# Altium PCB PCB1.PcbDoc
Units mm, origin at the board's own origin, x right, y up, seen from the top; angles counter-clockwise.
Board outline 35 x 51.18 mm, 4 copper layers (Top Layer 1, Layer 1, Layer 2, Bottom Layer 1), stack 1.626 mm thick; 67 components, 61 nets, 341 pads, 0 vias.
Unrouted connection lines stored in the file: 87.
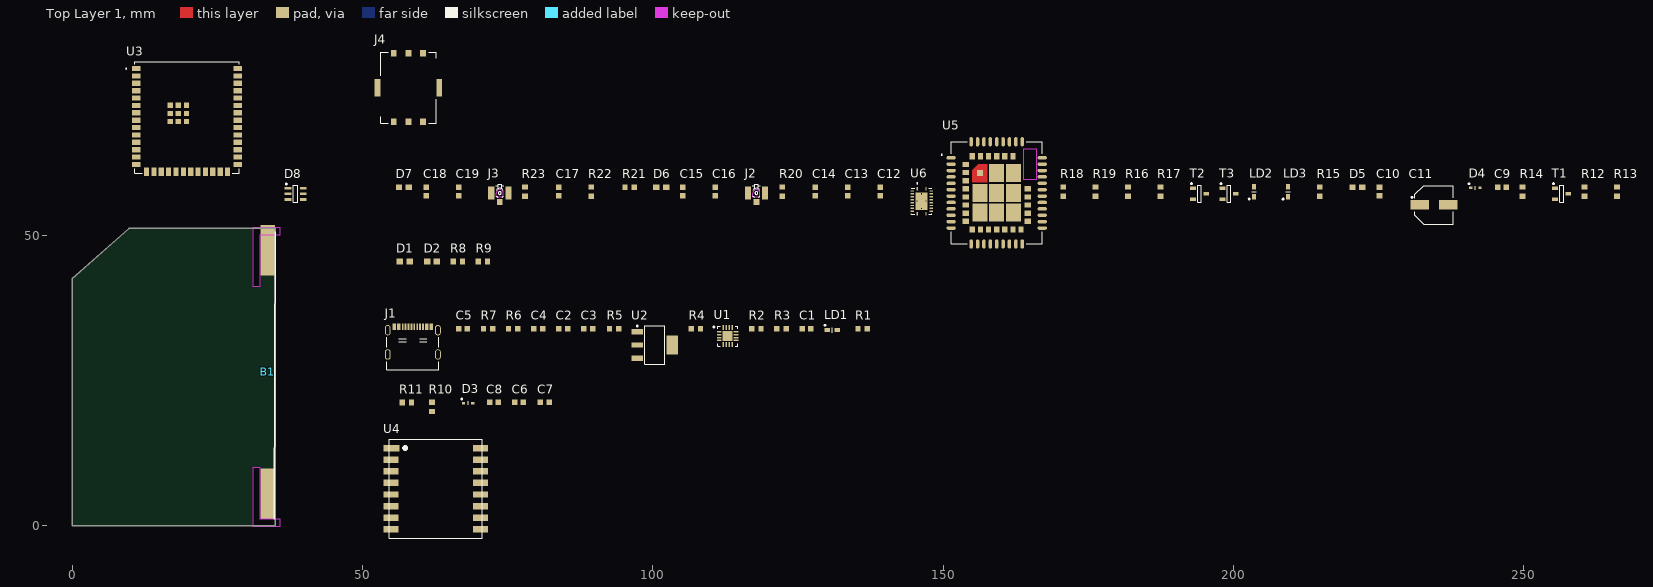
[diagram p0: Top Layer 1 view]
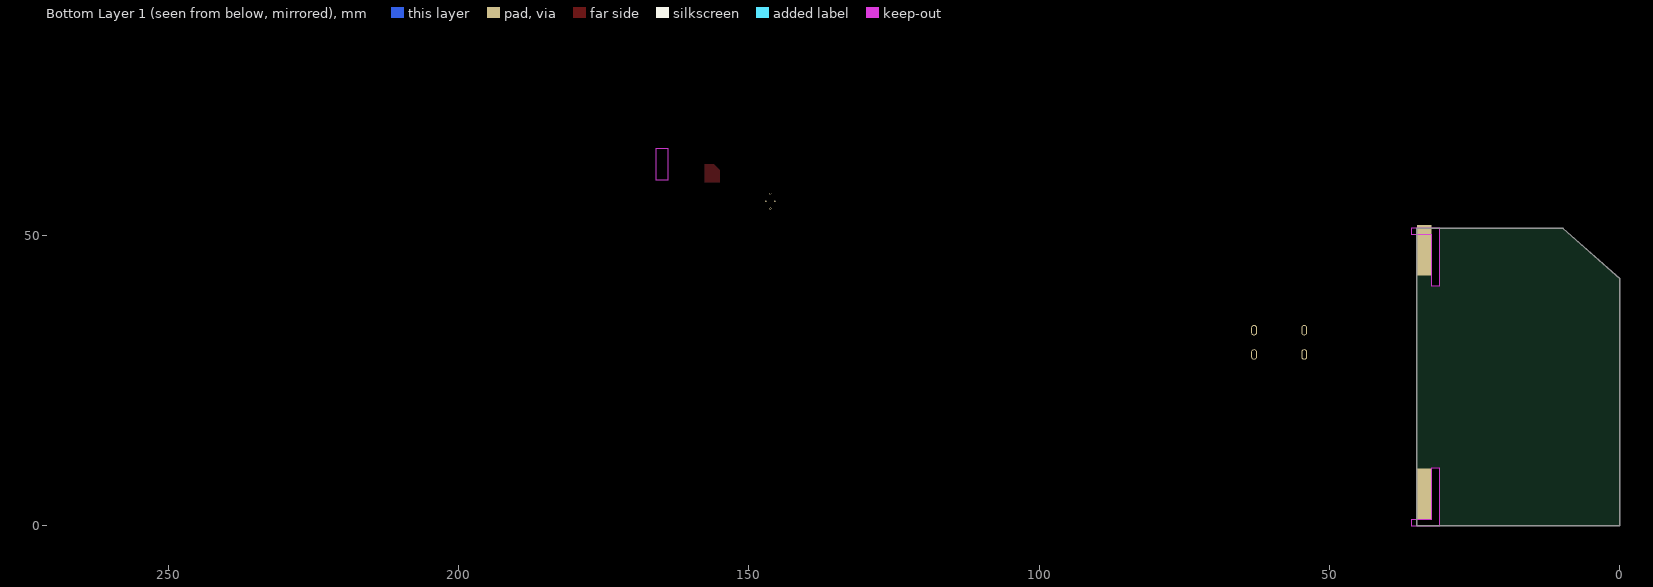
[diagram p1: Bottom Layer 1 view, seen from below]
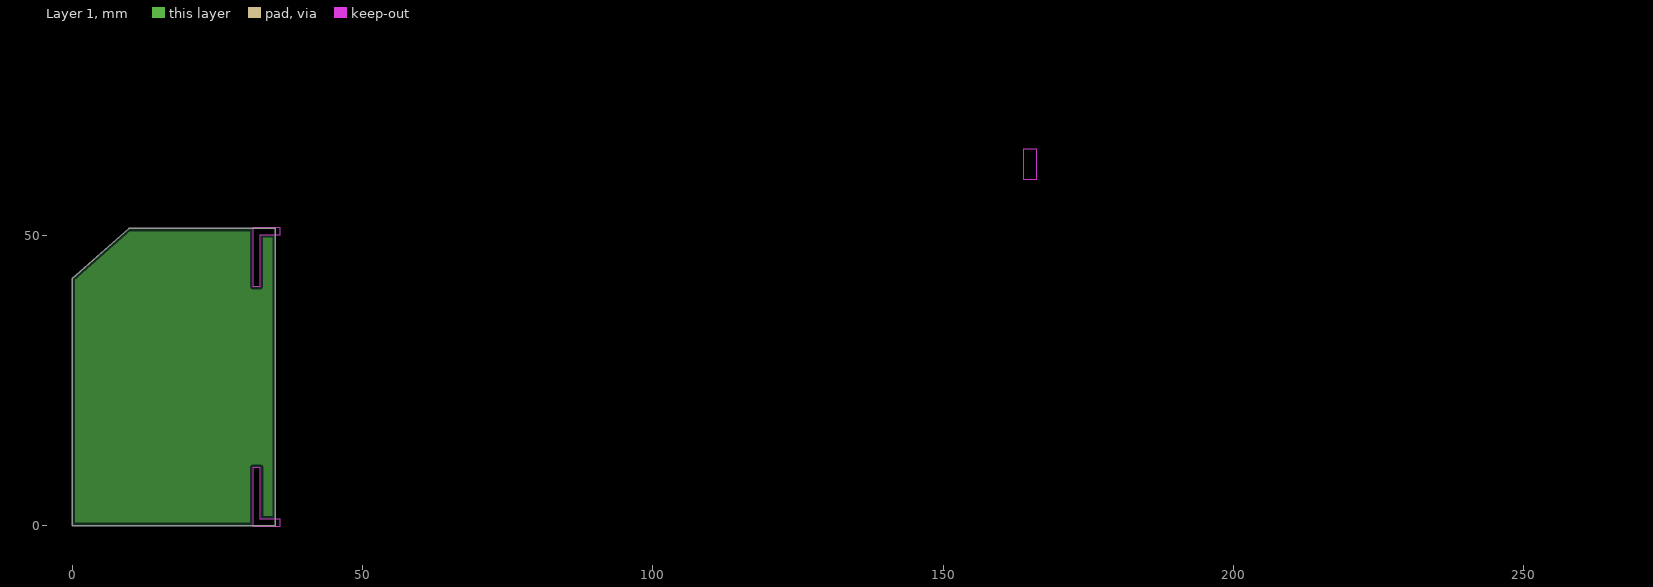
[diagram p2: Layer 1, clearances drawn from the general rule]
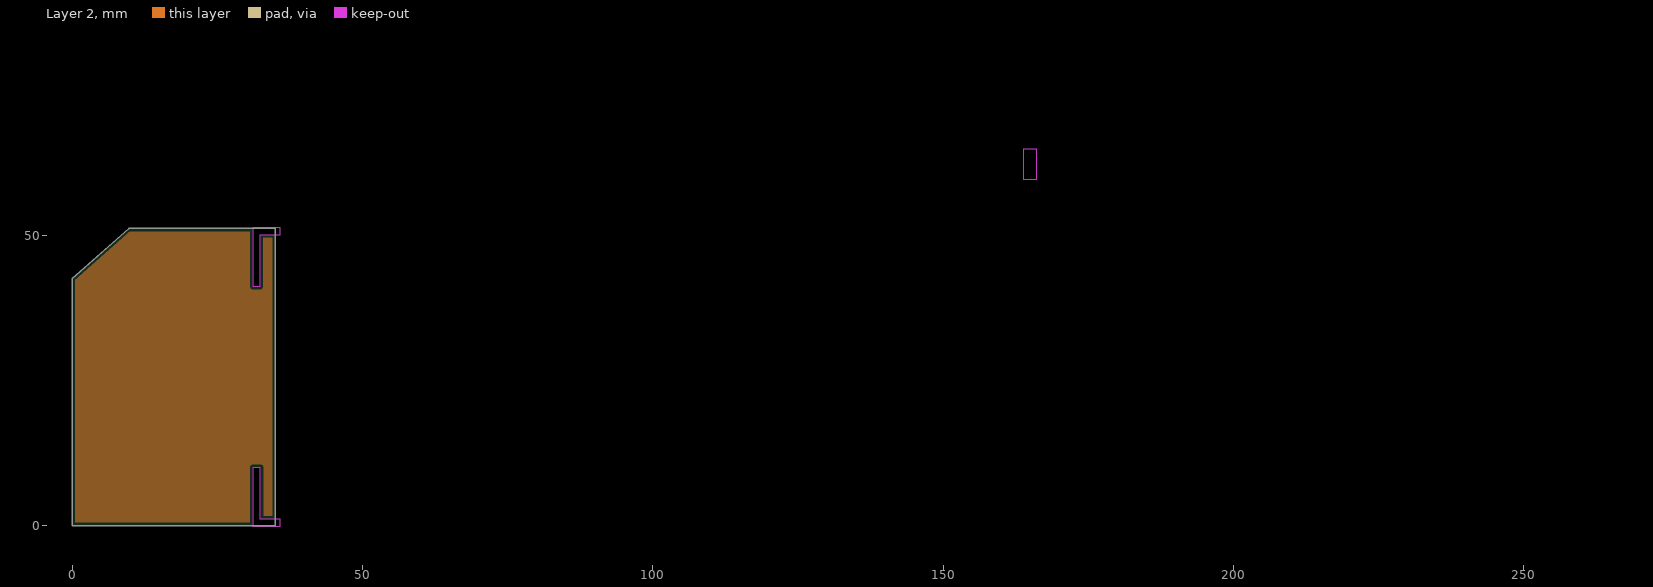
[diagram p3: Layer 2, clearances drawn from the general rule]

## Layer stack, top to bottom
Top Solder: solder mask 0.0102, Solder Resist, Dk 3.5
Top Layer 1: signal copper 0.035
Dielectric 2: prepreg 0.21, PP-006, Dk 4.1
Layer 1: plane copper 0.018, net GND
Dielectric 1: dielectric 1.1, FR-4, Dk 4.8
Layer 2: plane copper 0.018, net GND
Dielectric 3: prepreg 0.21, PP-006, Dk 4.1
Bottom Layer 1: signal copper 0.035
Bottom Solder: solder mask 0.0102, Solder Resist, Dk 3.5

## Board outline
0,0 0,42.511 9.776,51.181 35,51.181 35,0

## Design rules (kind name [scope] priority, off if disabled: settings)
Clearance [All] p1: gap=0.127 ignorepadtopadclearanceinfootprint=FALSE
HoleSize [All] p1: absolutevalues=TRUE maxlimit=6.3 minlimit=0.2 maxpercent=80.000 minpercent=20.000
PlaneClearance [All] p1: clearance=0.508
PlaneConnect [All] p1: planeconnectstyle=Relief reliefexpansion=0.508 reliefentries=4 reliefconductorwidth=0.254 reliefairgap=0.254
PolygonConnect [All] p1: connectstyle=Relief reliefconductorwidth=0.254 reliefentries=4 polygonreliefangle="90 Angle" airgapwidth=0.254
RoutingVias [All] p1: holewidth=0.711 width=1.27 viastyle="Through Hole" minholewidth=0.2 minwidth=0.45 maxholewidth=2.44 maxwidth=3
SolderMaskExpansion [All] p1: expansion=0.102 istentingtop=FALSE
SupplyNets "Schematic Supply Nets_5" [InNet('+1V8')] p1: voltage=0.000
SupplyNets "Schematic Supply Nets_4" [InNet('VUSB')] p2: voltage=0.000
SupplyNets "Schematic Supply Nets_3" [InNet('GND')] p3: voltage=0.000
SupplyNets "Schematic Supply Nets_2" [InNet('VBAT')] p4: voltage=0.000
SupplyNets "Schematic Supply Nets_1" [InNet('+4V4')] p5: voltage=0.000
SupplyNets "Schematic Supply Nets" [InNet('+3V3')] p6: voltage=0.000
Width [All] p1: maxlimit=1 minlimit=0.127 preferedwidth=0.254
27 further rules are at their usual default settings.

## Classes and differential pairs
component class SIM7080G: C9 C10 C11 C12 C13 C14 C15 C16 C17 C18 C19 D4 D5 D6 D7 D8 J2 J3 J4 LD2 LD3 R12 R13 R14 R15 R16 R17 R18 R19 R20 R21 R22 R23 T1 T2 T3 U5 U6
component class MCU: C6 C7 C8 D3 R10 R11 U3 U4
component class Power: B1 C1 C2 C3 C4 C5 C21 C27 D1 D2 J1 LD1 R1 R2 R3 R4 R5 R6 R7 R8 R9 R24 R25 R26 R27 R28 U1 U2

## Components (designator, comment, footprint, x,y, rotation, side; value= is the part's Value field where it differs from the comment)
B1 "Battery" PCB.BATTERY.HOLDER.14500 34.817,1.107 r90 top locked
C1 "1uF" CAPC1608X90N 126.492,33.909 r0 top
C2 "1uF" CAPC1608X90N 84.582,33.909 r0 top
C3 "4.7uF" CAPC1608X90N 88.9,33.909 r0 top
C4 "22uF" CAPC1608X90N 80.264,33.909 r0 top
C5 "1uF" CAPC1608X90N 67.31,33.909 r0 top
C6 "100nF" CAPC1608X90N 76.962,21.209 r0 top
C7 "1uF" CAPC1608X90N 81.407,21.209 r0 top
C8 "100nF" CAPC1608X90N 72.644,21.209 r0 top
C9 "100nF" CAPC1608X90N 246.253,58.293 r0 top
C10 "1uF" CAPC1608X90N 225.171,57.531 r90 top
C11 "100uF" CAPAE660X540N 234.569,55.245 r0 top
C12 "100nF" CAPC1608X90N 139.192,57.531 r90 top
C13 "100nF" CAPC1608X90N 133.604,57.531 r90 top
C14 "100nF" CAPC1608X90N 128.016,57.531 r90 top
C15 "100nF" CAPC1608X90N 105.156,57.531 r90 top
C16 "100nF" CAPC1608X90N 110.744,57.531 r90 top
C17 "100nF" CAPC1608X90N 83.82,57.531 r90 top
C18 "100nF" CAPC1608X90N 60.96,57.531 r90 top
C19 "100nF" CAPC1608X90N 66.548,57.531 r90 top
D1 "0603ESDA-MLP1" EATON_0603ESDA-MLP 57.277,45.466 r0 top
D2 "0603ESDA-MLP1" EATON_0603ESDA-MLP 61.976,45.466 r0 top
D3 "VESD01C1-02VHG3" SODFL1608X70N 68.199,21.082 r0 top
D4 "VESD01C1-02VHG3" SODFL1608X70N 241.681,58.166 r0 top
D5 "0603ESDA-MLP1" EATON_0603ESDA-MLP 221.361,58.293 r0 top
D6 "0603ESDA-MLP1" EATON_0603ESDA-MLP 101.473,58.293 r0 top
D7 "0603ESDA-MLP1" EATON_0603ESDA-MLP 57.15,58.293 r0 top
D8 "BZA462A" SOT95P275X110-6N 38.481,57.15 r0 top
J1 "USB 2.0" GCT_USB4105-GF-A 58.676,31.565 r0 top
J2 "U.FL" HIROSE_U.FL-R-SMT-1(10) 117.856,57.277 r0 top
J3 "U.FL" HIROSE_U.FL-R-SMT-1(10) 73.66,57.277 r0 top
J4 "SIMCard" Connector.SIM805 57.912,75.438 r0 top
LD1 "Red" LED_DIALIGHT_598-8010-107F 130.937,33.655 r0 top
LD2 "Red" LED_DIALIGHT_598-8010-107F 203.581,57.531 r90 top
LD3 "Red" LED_DIALIGHT_598-8010-107F 209.423,57.531 r90 top
R1 "1.5k" RESC1608X55N 136.144,33.909 r0 top
R2 "1.13k" RESC1608X55N 117.856,33.909 r0 top
R3 "46.4k" RESC1608X55N 122.174,33.909 r0 top
R4 "1.18k" RESC1608X55N 107.442,33.909 r0 top
R5 "10k" RESC1608X55N 93.345,33.909 r0 top
R6 "1.18K" RESC1608X55N 75.946,33.909 r0 top
R7 "1.18K" RESC1608X55N 71.628,33.909 r0 top
R8 "51k" RESC1608X55N 66.421,45.466 r0 top
R9 "51k" RESC1608X55N 70.739,45.466 r0 top
R10 "1.13k" RESC1608X55N 61.976,20.447 r90 top
R11 "1.13k" RESC1608X55N 57.658,21.209 r0 top
R12 "4.3k" RESC1608X55N 260.477,57.531 r90 top
R13 "4.3k" RESC1608X55N 266.065,57.531 r90 top
R14 "4.3k" RESC1608X55N 249.809,57.531 r90 top
R15 "43k" RESC1608X55N 214.884,57.531 r90 top
R16 "4.3k" RESC1608X55N 181.864,57.531 r90 top
R17 "4.3k" RESC1608X55N 187.452,57.531 r90 top
R18 "43k" RESC1608X55N 170.688,57.531 r90 top
R19 "43k" RESC1608X55N 176.276,57.531 r90 top
R20 "43k" RESC1608X55N 122.301,57.531 r90 top
R21 "43k" RESC1608X55N 96.012,58.293 r0 top
R22 "43k" RESC1608X55N 89.408,57.531 r90 top
R23 "43k" RESC1608X55N 77.978,57.531 r90 top
T1 "BC817" SOT95P230X110-3N 256.54,57.15 r0 top
T2 "BC817" SOT95P230X110-3N 194.183,57.15 r0 top
T3 "BC817" SOT95P230X110-3N 199.263,57.15 r0 top
U1 "BQ24073RGTR" bq24073 112.903,32.639 r0 top
U2 "AMS1117-3.3" IC.AMS1117-3.3 100.33,31.115 r0 top
U3 "ESP32.S3" IC.ESP32.S3.WROOM.1U 11.038,78.716 r0 top
U4 "LoRaModual" IC.RA-02 62.611,6.35 r0 top
U5 "IC.SIM7080G" IC.SIM7080G 159.237,57.306 r0 top
U6 "IC.TXB0108RGYR" IC.TXB0108RGYR 146.304,55.88 r0 top

## Footprints (in the part's own frame and the unit in brackets; to place one, negate y for a bottom-side part, rotate by r counter-clockwise, add the part's x,y. Pads: shape width x height; smd on the part's side, far side on the other; paste and mask are expansions set on the pad)
bq24073 [mm] "QFN, 16-Leads, Body 3.00x3.00mm, Pitch 0.50mm, Thermal Pad 1.70x1.70mm, IPC Medium Density"
  rect 0.85x0.25 smd: 1(-1.45,0.75) 2(-1.45,0.25) 3(-1.45,-0.25) 4(-1.45,-0.75) 9(1.45,-0.75) 10(1.45,-0.25) 11(1.45,0.25) 12(1.45,0.75)
  rect 0.25x0.85 smd: 5(-0.75,-1.45) 6(-0.25,-1.45) 7(0.25,-1.45) 8(0.75,-1.45) 13(0.75,1.45) 14(0.25,1.45) 15(-0.25,1.45) 16(-0.75,1.45)
  rect 1.7x1.7 smd: 17(0,0)
  silkscreen extent -2.5,-1.73 1.73,1.73, body extent -1.63,-1.63 1.63,1.63, height 1
CAPAE660X540N [mm] "Capacitor, Aluminium Electrolytric, 6.6mm L X 6.6mm W X 5.4mm H, IPC Medium Density"
  rect 3.15x1.6 smd: 1(-2.45,0) 2(2.45,0)
  silkscreen extent -3.95,-3.3 3.3,3.3, body extent -3.9,-3.4 3.9,3.4, height 5.7
CAPC1608X90N [mm] "Chip Capacitor, Body 1.6x0.8mm IPC Medium Density"
  rect 0.95x0.95 smd: 1(-0.75,0) 2(0.75,0)
  body extent -0.85,-0.45 0.85,0.45, height 0.9
Connector.SIM805 [mm]
  rect 1x1.1 smd: C1(2.54,-5.9) C2(0,-5.9) C3(-2.54,-5.9) C5(2.54,5.9) C6(0,5.9) C7(-2.54,5.9)
  rect 1x3 smd: C4(5.3,0) C8(-5.3,0)
  silkscreen extent -4.77,-6.1 4.77,6.1, body extent -5.53,-5.85 5.27,6.35, height 1.35
EATON_0603ESDA-MLP [mm] "0603, 2-Leads, Body 1.57mm L X 0.81mm W X 0.38mm H body, IPC Medium Density"
  rect 1.1x1 smd: 1(-0.85,0) 2(0.85,0)
  body extent -0.79,-0.41 0.79,0.41, height 0.38
GCT_USB4105-GF-A [mm] "USB-C (USB TYPE-C) USB 2.0 Receptacle Connector 24 (16+8 Dummy) Position Surface Mount, Right Angle; Through Hole"
  rect 0.6x1.15 smd: A1(-3.2,2.665) A4(-2.4,2.665) A9(2.4,2.665) A12(3.2,2.665)
  rect 0.3x1.15 smd: A5(-1.25,2.665) A6(-0.25,2.665) A7(0.25,2.665) A8(1.25,2.665) B5(1.75,2.665) B6(0.75,2.665) B7(-0.75,2.665) B8(-1.75,2.665)
  round 0.15 hole 0.65 mask+0.25: MEC1(-2.89,1.59) MEC2(2.89,1.59)
  oval 1x1.8 hole 0.6 slot 1.4 at 90 deg: SHIELD(-4.32,-2.09) SHIELD(-4.32,2.09) SHIELD(4.32,-2.09) SHIELD(4.32,2.09)
  silkscreen extent -4.47,-4.69 4.47,0.85, body extent -4.47,-4.69 4.47,3.01, height 3.26
HIROSE_U.FL-R-SMT-1(10) [mm] "Up to 6GHz Ultra Small Surface Mount Male Coaxial Connectors U.FL Series"
  rect 1x1.05 smd: 1(0,-1.525)
  rect 1.05x2.2 smd: 2(-1.475,0) 2(1.475,0)
  Top Layer 1 keep-out lines w0.1: -0.6,-0.65 0.6,-0.65 0.6,0 ccw(c0,0) -0.6,0 -0.6,-0.65
  silkscreen extent -0.7,-0.69 0.7,1.55, body extent -1.5,-1.55 1.5,1.55, height 1.25
IC.AMS1117-3.3 [mm] "SOT223, 4-Leads, Body 6.51x7.00mm (avg), Pitch 2.29mm, IPC Medium Density"
  rect 2x0.9 smd: 1(-3,2.29) 2(-3,0) 3(-3,-2.29)
  rect 2x3.25 smd: 4(3,0)
  silkscreen extent -3.12,-3.35 1.7,3.41, body extent -3.5,-3.35 3.5,3.35, height 1.8
IC.ESP32.S3.WROOM.1U [mm]
  rect 1.5x0.9 smd: 1(0,0) 2(0,-1.27) 3(0,-2.54) 4(0,-3.81) 5(0,-5.08) 6(0,-6.35) 7(0,-7.62) 8(0,-8.89) 9(0,-10.16) 10(0,-11.43) 11(0,-12.7) 12(0,-13.97) 13(0,-15.24) 14(0,-16.51) 27(17.5,-16.51) 28(17.5,-15.24) 29(17.5,-13.97) 30(17.5,-12.7) 31(17.5,-11.43) 32(17.5,-10.16) 33(17.5,-8.89) 34(17.5,-7.62) 35(17.5,-6.35) 36(17.5,-5.08) 37(17.5,-3.81) 38(17.5,-2.54) 39(17.5,-1.27) 40(17.5,0)
  rect 0.9x1.5 smd: 15(1.765,-17.76) 16(3.035,-17.76) 17(4.305,-17.76) 18(5.575,-17.76) 19(6.845,-17.76) 20(8.115,-17.76) 21(9.385,-17.76) 22(10.655,-17.76) 23(11.925,-17.76) 24(13.195,-17.76) 25(14.465,-17.76) 26(15.735,-17.76)
  rect 0.9x0.9 smd: 41_1(5.85,-6.32) 41_2(7.25,-6.32) 41_3(8.65,-6.32) 41_4(5.85,-7.72) 41_5(7.25,-7.72) 41_6(8.65,-7.72) 41_7(5.85,-9.12) 41_8(7.25,-9.12) 41_9(8.65,-9.12)
  silkscreen extent -1.85,-18.01 17.75,1.19, body extent -0.25,-18.01 17.75,1.19, height 3.35
IC.RA-02 [mm]
  rect 2.8x1.1 smd: 1(-7.6,7)
  rect 2.6x1.1 smd: 2(-7.7,5) 3(-7.7,3) 4(-7.7,1) 5(-7.7,-1) 6(-7.7,-3) 7(-7.7,-5) 8(-7.7,-7) 9(7.7,-7) 10(7.7,-5) 11(7.7,-3) 12(7.7,-1) 13(7.7,1) 14(7.7,3) 15(7.7,5) 16(7.7,7)
  silkscreen extent -8,-8.5 8,8.5, body extent -8.5,-8.5 8.5,8.5, height 3.3
IC.SIM7080G [mm]
  oval 1.6x0.6 smd paste-2: 1(-7.85,6.05) 2(-7.85,4.95) 3(-7.85,3.85) 4(-7.85,2.75) 5(-7.85,1.65) 6(-7.85,0.55) 7(-7.85,-0.55) 8(-7.85,-1.65) 9(-7.85,-2.75) 10(-7.85,-3.85) 11(-7.85,-4.95) 12(-7.85,-6.05) 22(7.85,-6.05) 23(7.85,-4.95) 24(7.85,-3.85) 25(7.85,-2.75) 26(7.85,-1.65) 27(7.85,-0.55) 28(7.85,0.55) 29(7.85,1.65) 30(7.85,2.75) 31(7.85,3.85) 32(7.85,4.95) 33(7.85,6.05)
  oval 0.6x1.6 smd paste-2: 13(-4.4,-8.8) 14(-3.3,-8.8) 15(-2.2,-8.8) 16(-1.1,-8.8) 17(0,-8.8) 18(1.1,-8.8) 19(2.2,-8.8) 20(3.3,-8.8) 21(4.4,-8.8) 34(4.4,8.8) 35(3.3,8.8) 36(2.2,8.8) 37(1.1,8.8) 38(0,8.8) 39(-1.1,8.8) 40(-2.2,8.8) 41(-3.3,8.8) 42(-4.4,8.8)
  rect 1.1x0.9 smd paste-2: 43(-5.35,4.9) 44(-5.35,3.5) 45(-5.35,2.1) 46(-5.35,0.7) 47(-5.35,-0.7) 48(-5.35,-2.1) 49(-5.35,-3.5) 50(-5.35,-4.9) 58(5.35,-4.9) 59(5.35,-3.5) 60(5.35,-2.1) 61(5.35,-0.7) 62(5.35,0.7)
  rect 0.9x1.1 smd paste-2: 51(-4.2,-6.3) 52(-2.8,-6.3) 53(-1.4,-6.3) 54(0,-6.3) 55(1.4,-6.3) 56(2.8,-6.3) 57(4.2,-6.3) 63(2.8,6.3) 64(1.4,6.3) 65(0,6.3) 66(-1.4,6.3) 67(-2.8,6.3) 68(-4.2,6.3)
  rect 1x1 smd paste-1 mask+0: 69(-2.9,3.4)
  rect 2.6x3.1 smd paste-3: 70(-2.9,0) 71(-2.9,-3.4) 72(0,-3.4) 73(2.9,-3.4) 74(2.9,0) 75(2.9,3.4) 76(0,3.4) 77(0,0)
  Top Layer 1 region: -1.6,1.85 -4.2,1.85 -4.2,3.92 -3.17,4.95 -1.6,4.95
  Keep-Out Layer region: 6.8,2.3 4.65,2.3 4.65,7.6 6.8,7.6
  silkscreen extent -9.55,-8.8 7.85,8.8, body extent -7.85,-8.8 7.85,8.8, height 2.6
IC.TXB0108RGYR [mm]
  rrect5% 0.24x0.6 smd: 1(-0.75,2.15) 10(-0.75,-2.15) 11(0.75,-2.15) 20(0.75,2.15)
  rrect5% 0.6x0.24 smd: 2(-1.65,1.75) 3(-1.65,1.25) 4(-1.65,0.75) 5(-1.65,0.25) 6(-1.65,-0.25) 7(-1.65,-0.75) 8(-1.65,-1.25) 9(-1.65,-1.75) 12(1.65,-1.75) 13(1.65,-1.25) 14(1.65,-0.75) 15(1.65,-0.25) 16(1.65,0.25) 17(1.65,0.75) 18(1.65,1.25) 19(1.65,1.75)
  rect 2.05x3.05 smd paste-3: 21(0,0)
  round 0.3 hole 0.2 mask+0: 21_1(0,1.275) 21_2(-0.775,0) 21_3(0.775,0) 21_4(0,-1.275)
  silkscreen extent -1.75,-2.25 1.75,3.15, body extent -1.75,-2.25 1.75,2.25, height 1
LED_DIALIGHT_598-8010-107F [mm] "SMT Red LED, Body 1.6x0.8mm, 0603 Case,  DIALIGHT 598 Series"
  rect 0.95x0.7 smd: 1(-0.85,0) 2(0.85,0)
  silkscreen extent -1.42,-0.4 0,0.97, body extent -0.81,-0.39 0.81,0.39, height 0.71
PCB.BATTERY.HOLDER.14500 [mm] "PCB Battery Holder Embeded in PCB"
  rect 8.7x2.5 all layers, no hole: 1(4.354,1.162) 2(46.352,1.143)
  Keep-Out Layer board cut-out: 8.89,3.683 -1.209,3.683 -1.209,-0.998 -1.206,-1.001 0,-1.001 0,2.413 8.89,2.413
  Keep-Out Layer board cut-out: 50.203,3.697 40.105,3.697 40.107,2.427 48.997,2.427 48.997,-0.987 50.203,-0.987
  silkscreen extent 0,-0.13 49.53,0, body extent -1.14,-14.33 50.16,3.67, height 7.05
RESC1608X55N [mm] "Chip Resistor, EIA 0603, Metric 1608, Body 1.6x0.8mm, IPC Medium Density"
  rect 0.9x1 smd: 1(-0.8,0) 2(0.8,0)
  body extent -0.87,-0.47 0.88,0.48, height 0.55
SODFL1608X70N [mm] "SODFL (SOD-523) Diode; 1.20mm W X 0.80mm L X 0.70mm H Body, IPC Medium Density"
  rect 0.55x0.42 smd: 1(-0.8,0) 2(0.8,0)
  silkscreen extent -1.22,-0.3 0,0.83, body extent -0.8,-0.4 0.8,0.4, height 0.7
SOT95P230X110-3N [mm] "SOT23, 3 pin, Pitch 0.95mm - 1.3mm W X 2.9mm L X 1.1mm H, IPC Medium Density"
  rect 1x0.6 smd: 1(-1.15,0.95) 2(-1.15,-0.95) 3(1.15,0)
  silkscreen extent -1.52,-1.45 0.33,1.87, body extent -1.08,-1.5 1.25,1.5, height 1.1
SOT95P275X110-6N [mm] "SOT, 0.95mm Pitch; 6 Pin, 1.50mm W X 2.90mm L X 1.10mm H body, IPC Medium Density"
  rect 1.15x0.5 smd: 1(-1.3,0.95) 2(-1.3,0) 3(-1.3,-0.95) 4(1.3,-0.95) 5(1.3,0) 6(1.3,0.95)
  silkscreen extent -1.72,-1.45 0.4,1.82, body extent -1.39,-1.55 1.39,1.55, height 1.1

## Part data
B1: library part PCB.Battery.Holder.14500, "PCB Battery Holder Embeded in PCB"
C1 C2 C5 C7 C10: library part CC0603_1UF_10V_10%_X5R, "Non-polarised capacitor", Case=0603, Manufacturer=GENERIC, Manufacturer1 ComponentHeight=0.9mm, Manufacturer1 Example=AVX, Manufacturer1 Part Number=0603ZD105KAT, Tolerance=±10%, Voltage=10V, Author="CERN DEM HF", Component Type=Standard, CreateDate=7/10/2023, HelpURL=\\cern.ch\dfs\Applications\Altium\Datasheets\CC0603_X5R_AVX_0603ZD105KAT.pdf, LatestRevisionDate=7/10/2023, Manufacturer Part Number=CC0603_1UF_10V_10%_X5R, Mounted=Yes, Part Description="SMD Multilayer Chip Ceramic Capacitor", Part Number=CC0603_1UF_10V_10%_X5R, Pin Count=2, Sense=No, SMD=Yes, Socket=No, Status=None, TC=X5R
C3: library part CC0603_4.7UF_10V_10%_X5R, "Non-polarised capacitor", Case=0603, Manufacturer=GENERIC, Manufacturer1 ComponentHeight=0.95mm, Manufacturer1 Example=TDK, Manufacturer1 Part Number=C1608X5R1A475K080, Tolerance=±10%, Voltage=10V, Author="CERN DEM HF", Component Type=Standard, CreateDate=7/10/2023, HelpURL=\\cern.ch\dfs\Applications\Altium\Datasheets\CC0603_X5R_TDK_C_Serie.pdf, LatestRevisionDate=7/10/2023, Manufacturer Part Number=CC0603_4.7UF_10V_10%_X5R, Mounted=Yes, Part Description="SMD Multilayer Chip Ceramic Capacitor", Part Number=CC0603_4.7UF_10V_10%_X5R, Pin Count=2, Sense=No, SMD=Yes, Socket=No, Status=Preferred, TC=X5R
C4: library part CC0603_22UF_10V_20%_X5R, "Non-polarised capacitor", Case=0603, Manufacturer=GENERIC, Manufacturer1 ComponentHeight=0.9mm, Manufacturer1 Example=TDK, Manufacturer1 Part Number=C1608X5R1A226M080, Tolerance=±20%, Voltage=10V, Author="CERN DEM BC", Component Type=Standard, CreateDate=12/3/2020, HelpURL=\\cern.ch\dfs\Applications\Altium\Datasheets\CC0603_X5R_TDK_C.pdf, LatestRevisionDate=12/3/2020, Manufacturer Part Number=CC0603_22UF_10V_20%_X5R, Mounted=Yes, Part Description="SMD Multilayer Chip Ceramic Capacitor", Part Number=CC0603_22UF_10V_20%_X5R, Pin Count=2, Sense=No, SMD=Yes, Socket=No, Status=None, TC=X5R
C6 C8 C9 C12 C13 C14 C15 C16 C17 C18 C19: library part CC0603_100NF_25V_20%_X5R_TDK_CGA3E2X5R1E104M080, "Non-polarised capacitor", Case=0603, Manufacturer=TDK, Manufacturer Part Number=CGA3E2X5R1E104M080, Tolerance=±20%, Voltage=25V, Author="CERN DEM BC", Component Type=Standard, ComponentHeight=0.9mm, CreateDate=7/1/2020, HelpURL="\\cern.ch\dfs\Applications\Altium\Datasheets\CC0603_X5R_TDK_CGA(Up to 75V).pdf", LatestRevisionDate=7/1/2020, Mounted=Yes, Part Description="SMD Multilayer Chip Ceramic Capacitor (Automotive Grade)", Part Number=CC0603_100NF_25V_20%_X5R_TDK_CGA3E2X5R1E104M080, Pin Count=2, Sense=No, SMD=Yes, Socket=No, Status="Not Recommended", TC=X5R
C11: library part CAE660-540_100UF_6.3V_20%, "Polarised capacitor", Case=D, Manufacturer=PANASONIC, Manufacturer Part Number=EEEFK0J101AP, Tolerance=±20%, Voltage=6.3V, Author="CERN DEM JLC", Component Type=Standard, ComponentHeight=5.8mm, CreateDate=12/3/2007, HelpURL=\\cern.ch\dfs\Applications\Altium\Datasheets\CAE_PANASONIC_FK-V.pdf, LatestRevisionDate=11/5/2014, Mounted=Yes, Part Description="Aluminum Electrolytic SMT Capacitor", Part Number=CAE660-540_100UF_6.3V_20%, Pin Count=2, Sense=No, SMD=Yes, Socket=No, Status="Not Recommended"
D1 D2 D5 D6 D7: "Transient Voltage Suppressor Diode (Bi-Directional)", Case=0603, Manufacturer=EATON, Voltage=8kV, Author="CERN DEM HF", Bonding=No, Component Type=Standard, ComponentHeight=0.38mm, CreateDate=9/21/2022, Device=0603ESDA-MLP1, HelpURL=\\cern.ch\dfs\Applications\Altium\Datasheets\0603ESDA-MLP1.pdf, LatestRevisionDate=9/21/2022, Manufacturer Part Number=0603ESDA-MLP1, Mounted=Yes, PackageDescription="0603, 2-Leads, Body 1.1mm L X 0.53mm W X 0.44mm H body, IPC Medium Density", Part Description="0.05pF 8kV Bidirectional ESD Voltage Suppressor", Part Number=0603ESDA-MLP1, Pin Count=2, PressFit=No, Sense=No, SMD=Yes, Socket=No
D3 D4: "Transient Voltage Suppressor Diode (Uni-Directional)", Case=SOD-523, Manufacturer="VISHAY SEMICONDUCTORS", Power=100W, Voltage=1V, Author="CERN DEM BC", Bonding=No, Component Type=Standard, ComponentHeight=0.7mm, CreateDate=5/19/2020, Device=VESD01C1-02VHG3, HelpURL=\\cern.ch\dfs\Applications\Altium\Datasheets\VESD01C1-02VHG3.pdf, LatestRevisionDate=5/19/2020, Manufacturer Part Number=VESD01C1-02VHG3, Mounted=Yes, PackageDescription="SODFL (SOD-523) Diode; 1.20mm W X 0.80mm L X 0.70mm H body, IPC Medium Density", Part Description="Single-Line ESD-Protection (30kV) Diode", Part Number=VESD01C1-02VHG3, Pin Count=2, PressFit=No, Sense=No, SMD=Yes, Socket=No
D8: "Quadruple ESD Transient Voltage Suppressor", Case=SOT23-6, Manufacturer="NXP SEMICONDUCTORS", Power=24W, Voltage=15kV, Author="CERN DEM JLC", Bonding=No, Component Type=Standard, ComponentHeight=1.1mm, CreateDate=11/9/2016, Device=BZA462A, HelpURL=\\cern.ch\dfs\Applications\Altium\Datasheets\BZA462A.pdf, LatestRevisionDate=11/9/2016, Manufacturer Part Number=BZA462A, Mounted=Yes, PackageDescription="SOT, 0.95mm Pitch; 6 Pin, 1.50mm W X 2.90mm L X 1.10mm H body, IPC Medium Density", Part Description="Quadruple ESD Transient Voltage Suppressor", Part Number=BZA462A, Pin Count=6, PressFit=No, Sense=No, SMD=Yes, Socket=No
J1: library part GCT_USB4105-GF-A, "2x8 Pin + 1 Shield  USB Type C Receptacle", Manufacturer=GCT, Manufacturer Part Number=USB4105-GF-A, Author="CERN DEM HF", Component Type=Standard, ComponentHeight=3.31mm, CreateDate=10/12/2023, Family="USB 2.0", HelpURL=\\cern.ch\dfs\Applications\Altium\Datasheets\GCT_USB4105-GF-A.pdf, LatestRevisionDate=10/12/2023, Mounted=Yes, Part Description="USB 2.0 Type C Receptacle 16 Contacts, SMD, horizontal", Part Number=GCT_USB4105-GF-A, Pin Count=20, PressFit=No, Sense=No, SMD=Yes, Socket=No, Status=None
J2 J3: library part HIROSE_U.FL-R-SMT-1(10), Manufacturer="HIROSE (HRS)", Manufacturer Part Number=U.FL-R-SMT-1(10), Author="CERN DEM JLC", Component Type=Standard, ComponentHeight=1.25mm, CreateDate=3/24/2010, Family=U.FL, HelpURL=\\cern.ch\dfs\Applications\Altium\Datasheets\HIROSE_U.FL-R-SMT-1(10).pdf, LatestRevisionDate=3/24/2010, Mounted=Yes, Part Description="Up to 6GHz Ultra Small Surface Mount Male Coaxial Connectors U.FL Series", Part Number=HIROSE_U.FL-R-SMT-1(10), Pin Count=2, PressFit=No, Sense=No, SMD=Yes, Socket=No, Status=None
J4: library part Connector.SIM8051, "SIM Nano Push Pull 6P1.35mmH with Logo 3µ\" Gold No Peg", Manufacturer="Global Connector Technology", Manufacturer Part Number=SIM8051-6-0-14-00-A, Package=None, Availability=Unavailable, Category=Connectors, ComponentLink1Description=https://datasheet.octopart.com/SIM8051-6-0-14-00-A-Global-Connector-Technology-datasheet-78375543.pdf?src-supplier=Future+Electronics, ComponentLink1URL=https://datasheet.octopart.com/SIM8051-6-0-14-00-A-Global-Connector-Technology-datasheet-78375543.pdf?src-supplier=Future+Electronics, ComponentLink2Description=https://gct.co/files/drawings/sim8051.pdf?src-supplier=Digikey, ComponentLink2URL=https://gct.co/files/drawings/sim8051.pdf?src-supplier=Digikey, ComponentLink3Description=https://datasheet.octopart.com/SIM8051-6-0-14-00-A-Global-Connector-Technology-datasheet-91940710.pdf?src-supplier=Newark, ComponentLink3URL=https://datasheet.octopart.com/SIM8051-6-0-14-00-A-Global-Connector-Technology-datasheet-91940710.pdf?src-supplier=Newark, ComponentLink4Description=Shop, ComponentLink4URL=https://eshop.eca.ir/%D8%B3%D9%88%DA%A9%D8%AA-%D8%AD%D8%A7%D9%81%D8%B8%D9%87-%D9%88-%D8%B3%DB%8C%D9%85-%DA%A9%D8%A7%D8%B1%D8%AA/10211-%D8%B3%D9%88%DA%A9%D8%AA-%D8%B3%DB%8C%D9%85-%DA%A9%D8%A7%D8%B1%D8%AA-%D9%86%D8%A7%D9%86%D9%88-6pin-%D9%BE%D9%84%D8%A7%D8%B3%D8%AA%DB%8C%DA%A9%DB%8C-%D8%A8%D8%A7-%D9%87%D9%88%D9%84%D8%AF%D8%B1-%D9%81%D9%84%D8%B2%DB%8C.html, MP=SIM8051-6-0-14-00-X-REVD, PRICE=None, Pricing 1="1500=0.52, 3000=0.51, 4500=0.5 (USD)", RoHS=Yes, Supplier 1="Future Electronics"
LD1 LD2 LD3: library part LED_DIALIGHT_598-8010-107F, "LED Red 1C 2A", Case=0603, Manufacturer=DIALIGHT, Manufacturer Part Number=598-8010-107F, Author="CERN DEM MR", Bonding=No, Color=Red, Component Type=Standard, ComponentHeight=0.7mm, CreateDate=1/9/2017, HelpURL=\\cern.ch\dfs\Applications\Altium\Datasheets\LED_DIALIGHT_598-8010-107F.pdf, LatestRevisionDate=1/9/2017, Mounted=Yes, PackageDescription="SMT Red LED, Body 1.6x0.8mm, 0603 Case,  DIALIGHT 598 Series", Part Description="Micro SMD Red Led, 598 Series", Part Number=LED_DIALIGHT_598-8010-107F, Pin Count=2, PressFit=No, Sense=No, SMD=Yes, Socket=No
R1 R2 R3 R4 R5 R10 R11: library part R0603_10K_0.1%_0.063W_10PPM, "Resistor - 0.1%", Case=0603, Manufacturer=GENERIC, Manufacturer1 ComponentHeight=0.5mm, Manufacturer1 Example="TYCO HOLSWORTHY", Manufacturer1 Part Number=RN73C1J10KBTDF, Power=0.063W, Tolerance=±0.1%, Author="CERN DEM JLC", Component Type=Standard, CreateDate=12/3/2007, HelpURL=\\cern.ch\dfs\Applications\Altium\Datasheets\R0603_Tyco_RN73.pdf, LatestRevisionDate=3/13/2008, Manufacturer Part Number=R0603_10K_0.1%_0.063W_10PPM, Mounted=Yes, Part Description="Thin Film Chip Resistor", Part Number=R0603_10K_0.1%_0.063W_10PPM, Pin Count=2, PressFit=No, Sense=No, SMD=Yes, Socket=No, Status="Not Recommended", TC=±10ppm
R6 R7: library part R0603_118R_0.1%_0.063W_10PPM, "Resistor - 0.1%", Case=0603, Manufacturer=GENERIC, Manufacturer1 ComponentHeight=0.5mm, Manufacturer1 Example="TYCO HOLSWORTHY", Manufacturer1 Part Number=RN73C1J118RBTDF, Power=0.063W, Tolerance=±0.1%, Author="CERN DEM JLC", Component Type=Standard, CreateDate=12/3/2007, HelpURL=\\cern.ch\dfs\Applications\Altium\Datasheets\R0603_Tyco_RN73.pdf, LatestRevisionDate=3/13/2008, Manufacturer Part Number=R0603_118R_0.1%_0.063W_10PPM, Mounted=Yes, Part Description="Thin Film Chip Resistor", Part Number=R0603_118R_0.1%_0.063W_10PPM, Pin Count=2, PressFit=No, Sense=No, SMD=Yes, Socket=No, Status="Not Recommended", TC=±10ppm
R8 R9: library part R0603_51K_1%_0.1W_100PPM, "Resistor - 1%", Case=0603, Manufacturer=GENERIC, Manufacturer1 ComponentHeight=0.55mm, Manufacturer1 Example="NIC COMPONENT", Manufacturer1 Part Number=NRC06F5102TRF, Power=0.1W, Tolerance=±1%, Author="CERN DEM JLC", Component Type=Standard, CreateDate=12/3/2007, HelpURL=\\cern.ch\dfs\Applications\Altium\Datasheets\R0603_NIC_NRC.pdf, LatestRevisionDate=3/13/2008, Manufacturer Part Number=R0603_51K_1%_0.1W_100PPM, Mounted=Yes, Part Description="General Purpose Thick Film Chip Resistor", Part Number=R0603_51K_1%_0.1W_100PPM, Pin Count=2, PressFit=No, Sense=No, SMD=Yes, Socket=No, Status=Preferred, TC=±100ppm/°C
R12 R13: library part R0603_43K_1%_0.1W_100PPM, "Resistor - 1%", Case=0603, Manufacturer=GENERIC, Manufacturer1 ComponentHeight=0.55mm, Manufacturer1 Example="NIC COMPONENT", Manufacturer1 Part Number=NRC06F4302TRF, Power=0.1W, Author="CERN DEM JLC", Component Type=Standard, CreateDate=12/3/2007, HelpURL=\\cern.ch\dfs\Applications\Altium\Datasheets\R0603_NIC_NRC.pdf, LatestRevisionDate=3/13/2008, Manufacturer Part Number=R0603_43K_1%_0.1W_100PPM, Mounted=Yes, Part Description="General Purpose Thick Film Chip Resistor", Part Number=R0603_43K_1%_0.1W_100PPM, Pin Count=2, PressFit=No, Sense=No, SMD=Yes, Socket=No, Status=Preferred, TC=±100ppm/°C
R14 R15 R16 R17 R18 R19 R20 R21 R22 R23: library part R0603_43K_1%_0.1W_100PPM, "Resistor - 1%", Case=0603, Manufacturer=GENERIC, Manufacturer1 ComponentHeight=0.55mm, Manufacturer1 Example="NIC COMPONENT", Manufacturer1 Part Number=NRC06F4302TRF, Power=0.1W, Tolerance=±1%, Author="CERN DEM JLC", Component Type=Standard, CreateDate=12/3/2007, HelpURL=\\cern.ch\dfs\Applications\Altium\Datasheets\R0603_NIC_NRC.pdf, LatestRevisionDate=3/13/2008, Manufacturer Part Number=R0603_43K_1%_0.1W_100PPM, Mounted=Yes, Part Description="General Purpose Thick Film Chip Resistor", Part Number=R0603_43K_1%_0.1W_100PPM, Pin Count=2, PressFit=No, Sense=No, SMD=Yes, Socket=No, Status=Preferred, TC=±100ppm/°C
T1 T2 T3: "NPN Transistor", Case=SOT23-3, Manufacturer="NXP SEMICONDUCTORS", Author="CERN DEM JLC", Bonding=No, Component Type=Standard, ComponentHeight=1.1mm, CreateDate=5/12/2011, Device=BC817, HelpURL=\\cern.ch\dfs\Applications\Altium\Datasheets\BC817.pdf, LatestRevisionDate=5/12/2011, Manufacturer Part Number=BC817, Mounted=Yes, PackageDescription="SOT23, 0.95mm Pitch; 3 Pin, 1.30mm W X 2.90mm L X 1.10mm H body, IPC Medium Density", Part Description="45V 500mA NPN General-Purpose Transistor", Part Number=BC817, Pin Count=3, PressFit=No, Sense=No, SMD=Yes, Socket=No
U1: "1.5A USB-FRIENDLY Li-Ion BATTERY CHARGER AND POWER-PATH MANAGEMENT IC"
U2: library part IC.AMS1117-3.3, "72dB@(120Hz) 1A Fixed 3.3V Positive electrode SOT-223-3 Linear Voltage Regulators (LDO) ROHS"
U3: library part ESP32.S3.WROOM.1U, "2.4 GHz Wi-Fi (802.11b/g/n) and Bluetooth® 5 module / Built around ESP32-S3 series of SoCs, Xtensa® dual-core 32-bit LX7 microprocessor / Flash up to 16 MB, PSRAM up to 16 MB / Up to 36 GPIOs, rich set of peripherals / On-board PCB antenna or external antenna connector", ComponentLink1Description=DataSheet, ComponentLink1URL=https://www.espressif.com/sites/default/files/documentation/esp32-s3-wroom-1_wroom-1u_datasheet_en.pdf
U4: library part IC.RA-02, "General ISM < 1GHz LoRaâ„¢ Transceiver Module 410MHz ~ 525MHz Antenna Not Included, I-PEX Surface Mount", Package=None, Check_prices=https://www.snapeda.com/parts/RA-02/AI-Thinker/view-part/?ref=eda, MF=Ai-Thinker, MP=RA-02, SnapEDA_Link=https://www.snapeda.com/parts/RA-02/AI-Thinker/view-part/?ref=snap
U5: "Cellular, Navigation Galileo, GLONASS, GPS, GNSS, LTE Transceiver Module 1.559GHz ~ 1.576GHz, 1.575GHz ~ 1.576GHz, 1.574GHz ~ 1.606GHz, 1.598GHz ~ 1.563GHz Antenna Not Included Surface Mount", Package=Package, Check_prices=https://www.snapeda.com/parts/SIM7080G/SIMCom/view-part/?ref=eda, MF=SIMCom, MP=SIM7080G, SnapEDA_Link=https://www.snapeda.com/parts/SIM7080G/SIMCom/view-part/?ref=snap
U6: "8-Bit Bidirectional Voltage-Level Shifter with Auto Direction Sensing and +/-15-kV ESD Protect", Package="VQFN-20 Texas Instruments", Check_prices=https://www.snapeda.com/parts/TXB0108RGYR/Texas+Instruments/view-part/?ref=eda, MF="Texas Instruments", MP=TXB0108RGYR, SnapEDA_Link=https://www.snapeda.com/parts/TXB0108RGYR/Texas+Instruments/view-part/?ref=snap

## Nets (pads, with @x,y where several pads share a name; then routed paths per layer and width w, separated by ;. In a path a pad name is that pad's centre, name@x,y a point inside that pad or via, vN(x,y) a via of type N, cw(c..) or ccw(c..) an arc to the next point about the centre after c; other vN are vias at no path point)
+1V8: C13.1 U5.40 U6.2 U6.10
+3V3: C4.2 C6.1 C7.1 C8.1 C12.1 D3.1 R6.2 U2.3 U2.4 U3.2 U3.3 U6.19
+4V4: C3.2 C9.1 C10.1 C11.1 D4.1 R1.2 R12.2 R13.2 U1.10 U1.11 U2.1 U5.34 U5.35
C\H\G\: LD1.1 U1.9
GND: B1.2 C1.1 C2.1 C3.1 C4.1 C5.1 C6.2 C7.2 C8.2 C9.2 C10.2 C11.2 C12.2 C13.2 C15.2 C16.2 C18.2 C19.2 D1.1 D2.1 D3.2 D4.2 D5.1 D6.1 D7.1 D8.2 D8.5 J1.A1 J1.A12 J2.2 J3.2 J4.C5 R2.2 R3.2 R4.2 R5.1 R7.1 R8.1 R9.2 R15.2 R18.2 R19.2 R21.2 R22.2 T1.2 T2.2 T3.2 U1.8 U1.17 U3.1 U3.40 U3.41_1 U3.41_2 U3.41_3 U3.41_4 U3.41_5 U3.41_6 U3.41_7 U3.41_8 U3.41_9 U5.8 U5.13 U5.19 U5.21 U5.27 U5.30 U5.31 U5.33 U5.36 U5.37 U5.45 U5.63 U5.66 U5.67 U5.69 U5.70 U5.71 U5.72 U5.73 U5.74 U5.75 U5.76 U5.77 U6.11 U6.21 U6.21_1 U6.21_2 U6.21_3 U6.21_4
GNSS_ANT: C18.1 R23.1 U5.68
NetC14_1: C14.1 C16.1 R20.2
NetC14_2: C14.2 D6.2 J2.1
NetC17_1: C17.1 C19.1 R23.2
NetC17_2: C17.2 D7.2 J3.1
NetJ1_A5: J1.A5 R8.2
NetJ1_B5: J1.B5 R9.1
NetLD1_2: LD1.2 R1.1
NetLD2_1: LD2.1 T2.3
NetLD2_2: LD2.2 R12.1
NetLD3_1: LD3.1 T3.3
NetLD3_2: LD3.2 R13.1
NETLIGHT: R16.1 U5.41
NetR2_1: R2.1 U1.16
NetR3_1: R3.1 U1.14
NetR4_1: R4.1 U1.12
NetR5_2: R5.2 U1.1
NetR6_1: R6.1 R7.2 U2.2
NetR10_1: R10.1 U3.13
NetR11_1: R11.1 U3.14
NetR14_1: R14.1 U3.30
NetR14_2: R14.2 R15.1 T1.1
NetR16_2: R16.2 R18.1 T2.1
NetR17_2: R17.2 R19.1 T3.1
NetR21_1: R21.1 U6.9
NetR22_1: R22.1 U6.12
NetU1_4: U1.4
NetU1_5: U1.5
NetU1_6: U1.6
NetU1_15: U1.15
NetU3_17: U3.17 U6.13
NetU3_18: U3.18 U6.14
NetU3_19: U3.19 U6.20
NetU3_20: U3.20 U6.18
NetU3_22: U3.22 U6.16
NetU3_25: U3.25 U6.15
NetU5_1: U5.1 U6.8
NetU5_2: U5.2 U6.7
NetU5_3: U5.3 U6.6
NetU5_4: U5.4 U6.1
NetU5_5: U5.5 U6.3
NetU5_6: U5.6 U6.4
NetU5_7: U5.7 U6.5
NetU6_17: U6.17
P\G\O\O\D\: U1.7
PWRKEY: D5.2 T1.3 U5.39
RF_ANT: C15.1 R20.1 U5.32
SIMCLK: D8.4 J4.C3 U5.16
SIMData: D8.3 J4.C7 U5.15
SIMRST: D8.6 J4.C2 U5.17
SIMVDD: D8.1 J4.C1 U5.18
STATUS: R17.1 U5.42
USB.Data.+: D1.2 J1.A6 J1.B6 R10.2
USB.Data.-: D2.2 J1.A7 J1.B7 R11.2
VBAT: B1.1 C1.2 C2.2 U1.2 U1.3
VUSB: C5.2 J1.A4 J1.A9 U1.13
pads on no net: J1.A8 J1.B8 J1.MEC1 J1.MEC2 J1.SHIELD J4.C4 J4.C6 J4.C8 U3.4 U3.5 U3.6 U3.7 U3.8 U3.9 U3.10 U3.11 U3.12 U3.15 U3.16 U3.21 U3.23 U3.24 U3.26 U3.27 U3.28 U3.29 U3.31 U3.32 U3.33 U3.34 U3.35 U3.36 U3.37 U3.38 U3.39 U4.1 U4.2 U4.3 U4.4 U4.5 U4.6 U4.7 U4.8 U4.9 U4.10 U4.11 U4.12 U4.13 U4.14 U4.15 U4.16 U5.9 U5.10 U5.11 U5.12 U5.14 U5.20 U5.22 U5.23 U5.24 U5.25 U5.26 U5.28 U5.29 U5.38 U5.43 U5.44 U5.46 U5.47 U5.48 U5.49 U5.50 U5.51 U5.52 U5.53 U5.54 U5.55 U5.56 U5.57 U5.58 U5.59 U5.60 U5.61 U5.62 U5.64 U5.65

## Polygon pours and split planes (outlines as drawn)
GND on Layer 1 (split plane): 30.609,41.212 30.61,41.211 30.609,41.211 30.614,41.161 30.619,41.112 30.62,41.111 30.634,41.064 30.648,41.016 30.649,41.016 30.649,41.015 30.672,40.972 30.696,40.928 30.696,40.927 30.728,40.889 30.759,40.851 30.759,40.85 30.76,40.85 30.798,40.819 30.836,40.787 30.837,40.787 30.881,40.763 30.925,40.74 30.926,40.74 30.973,40.726 31.02,40.711 31.021,40.711 31.071,40.706 31.12,40.701 31.121,40.701 32.391,40.704 32.441,40.709 32.49,40.714 32.491,40.714 32.538,40.728 32.585,40.743 32.586,40.743 32.63,40.767 32.674,40.79 32.674,40.791 32.713,40.822 32.751,40.854 32.752,40.854 32.783,40.893 32.814,40.931 32.815,40.931 32.815,40.932 32.838,40.975 32.862,41.019 32.862,41.02 32.876,41.067 32.891,41.115 32.891,41.116 32.896,41.165 32.9,41.214 32.9,49.594 34.49,49.594 34.49,1.618 32.915,1.618 32.915,9.997 32.905,10.097 32.876,10.192 32.829,10.281 32.765,10.358 32.688,10.422 32.6,10.469 32.504,10.498 32.404,10.508 31.134,10.508 31.035,10.498 30.939,10.469 30.851,10.422 30.773,10.358 30.71,10.281 30.663,10.192 30.634,10.097 30.624,9.997 30.624,0.51 0.51,0.51 0.51,42.282 9.97,50.671 30.609,50.671
GND on Layer 2 (split plane): 30.609,41.212 30.61,41.211 30.609,41.211 30.614,41.161 30.619,41.112 30.62,41.111 30.634,41.064 30.648,41.016 30.649,41.016 30.649,41.015 30.672,40.972 30.696,40.928 30.696,40.927 30.728,40.889 30.759,40.851 30.759,40.85 30.76,40.85 30.798,40.819 30.836,40.787 30.837,40.787 30.881,40.763 30.925,40.74 30.926,40.74 30.973,40.726 31.02,40.711 31.021,40.711 31.071,40.706 31.12,40.701 31.121,40.701 32.391,40.704 32.441,40.709 32.49,40.714 32.491,40.714 32.538,40.728 32.585,40.743 32.586,40.743 32.63,40.767 32.674,40.79 32.674,40.791 32.713,40.822 32.751,40.854 32.752,40.854 32.783,40.893 32.814,40.931 32.815,40.931 32.815,40.932 32.838,40.975 32.862,41.019 32.862,41.02 32.876,41.067 32.891,41.115 32.891,41.116 32.896,41.165 32.9,41.214 32.9,49.594 34.49,49.594 34.49,1.618 32.915,1.618 32.915,9.997 32.905,10.097 32.876,10.192 32.829,10.281 32.765,10.358 32.688,10.422 32.6,10.469 32.504,10.498 32.404,10.508 31.134,10.508 31.035,10.498 30.939,10.469 30.851,10.422 30.773,10.358 30.71,10.281 30.663,10.192 30.634,10.097 30.624,9.997 30.624,0.51 0.51,0.51 0.51,42.282 9.97,50.671 30.609,50.671

## Text inside footprints (layer, text, board x,y; h text height)
J1: Mechanical 8 "PCB Edge" at 55.379,27.358 h1